# Altium PCB BLBB.PcbDoc
Units mm, origin at the board's own origin, x right, y up, seen from the top; angles counter-clockwise.
Board outline 73.2 x 46.2 mm, 4 copper layers (Top Layer, Int1 (GND), Int2 (PWR), Bottom Layer), stack 1.556 mm thick; 46 components, 23 nets, 171 pads, 38 vias.
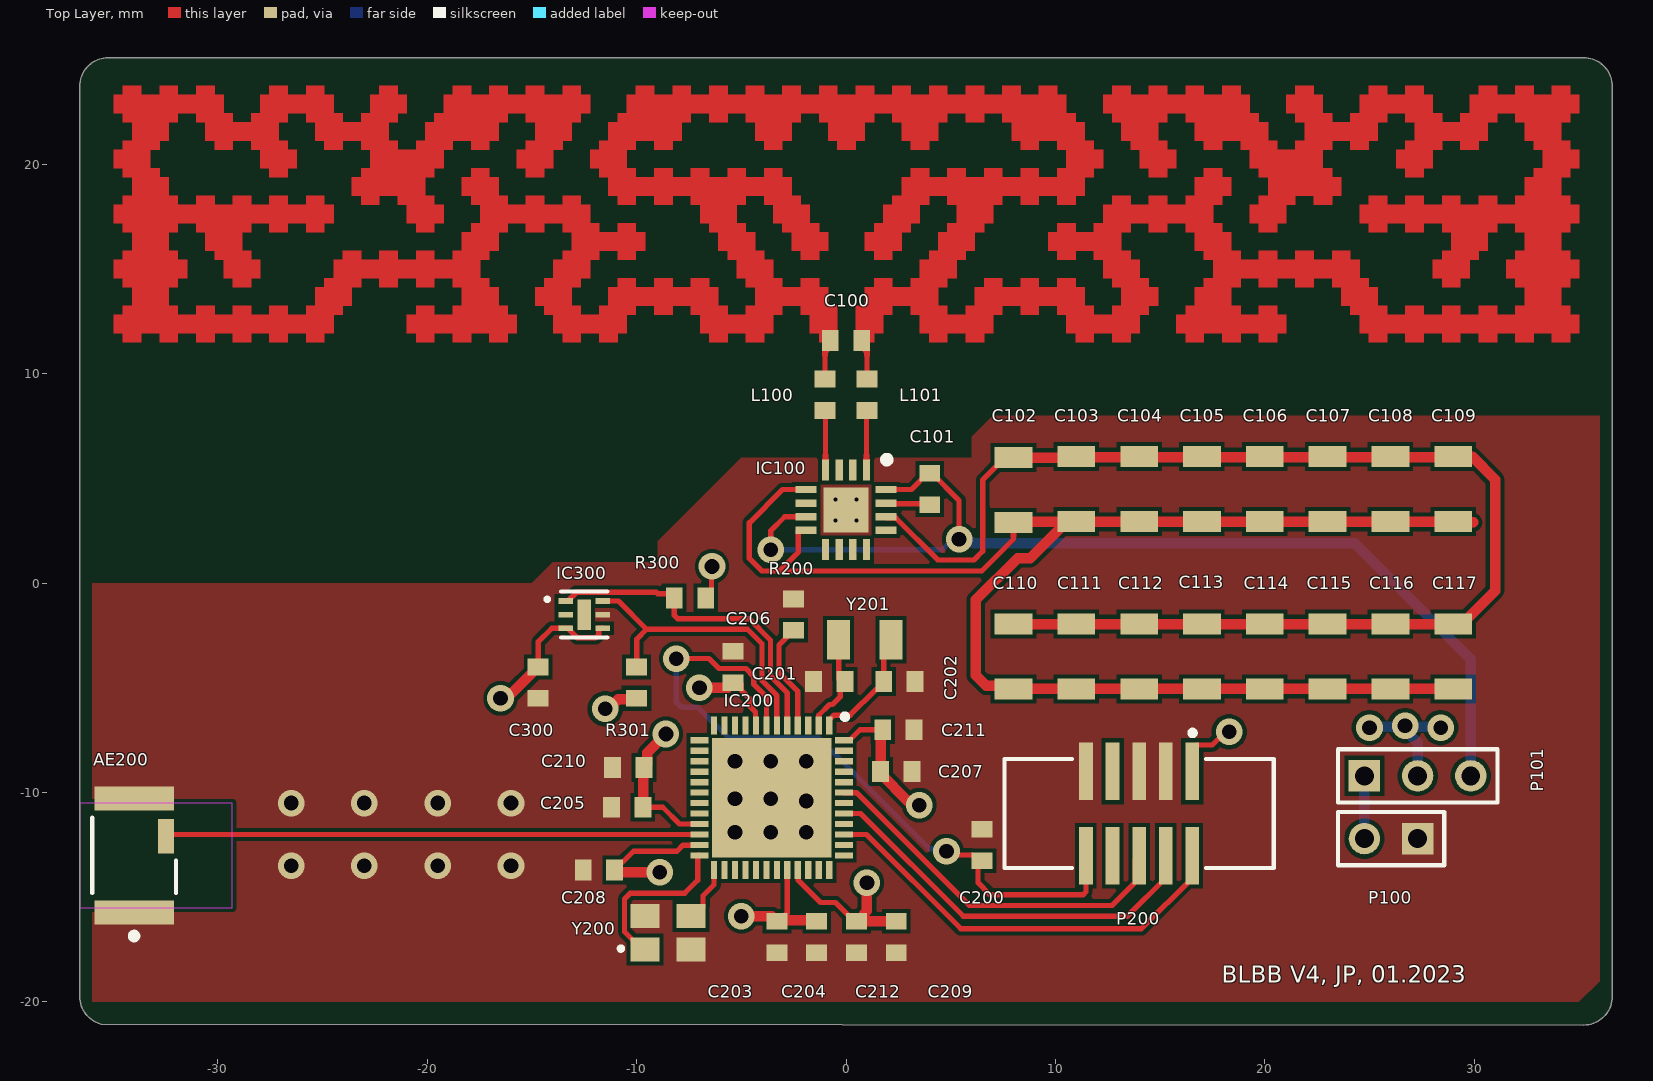
[diagram p0: Top Layer view]
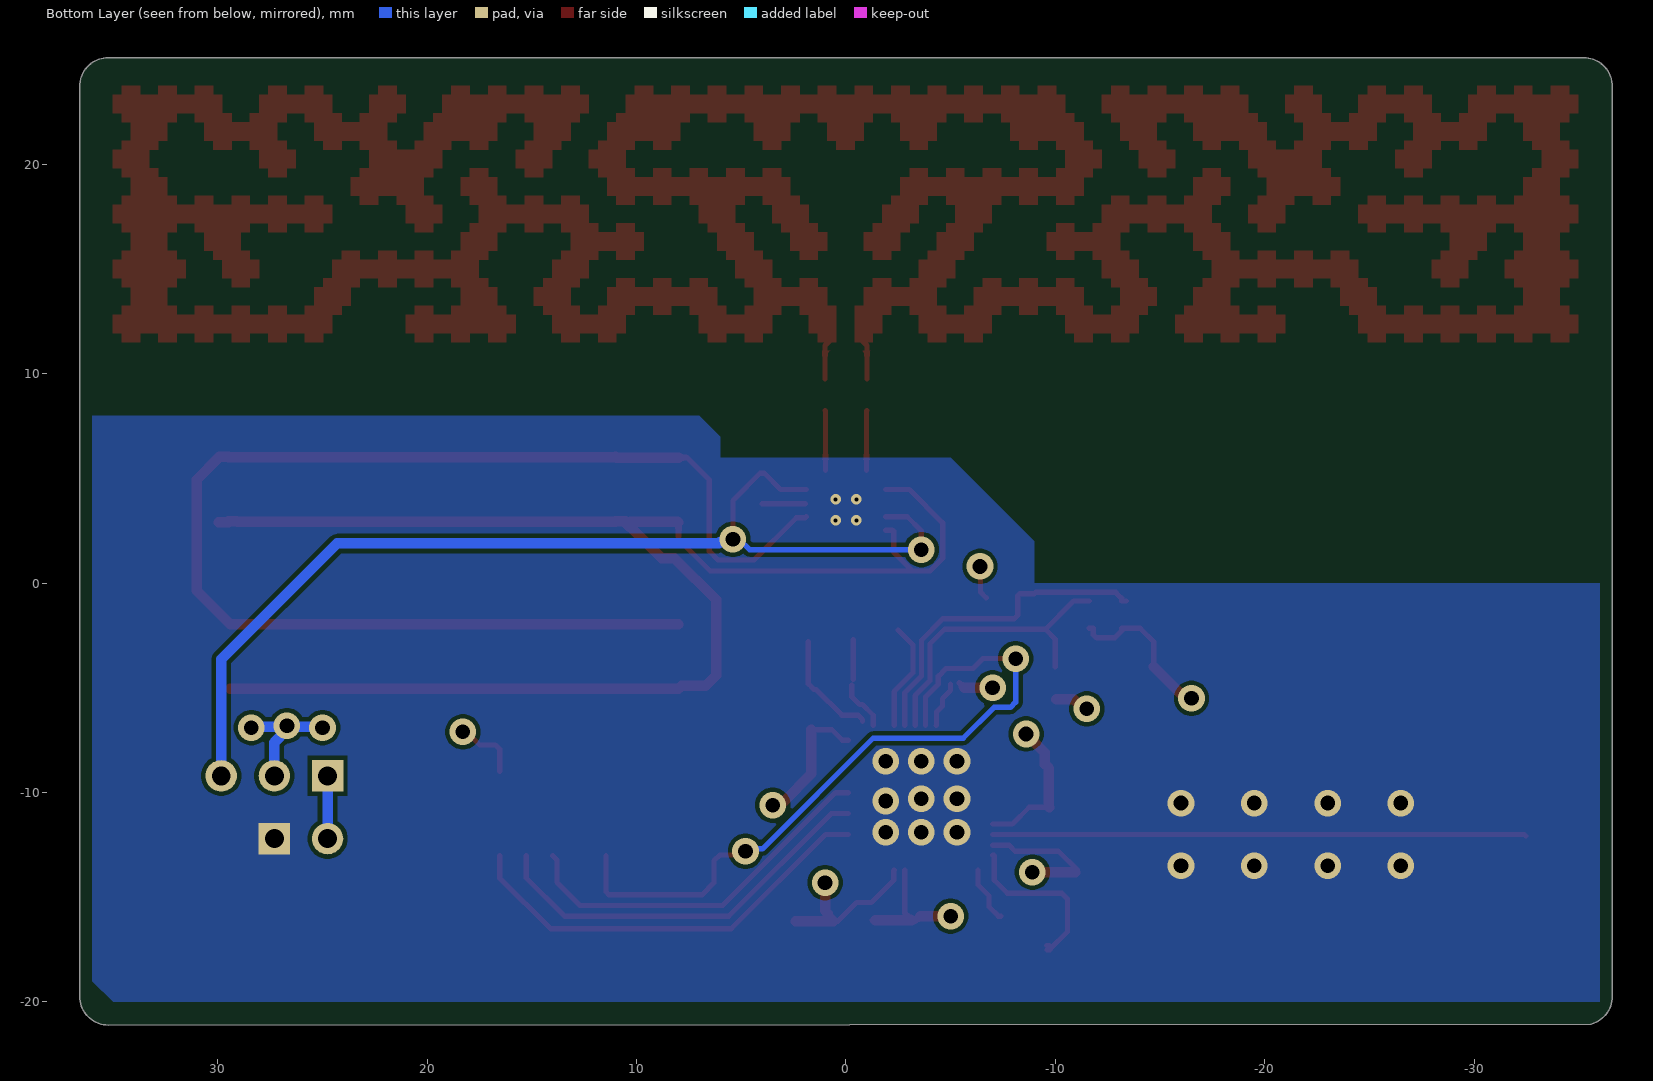
[diagram p1: Bottom Layer view, seen from below]
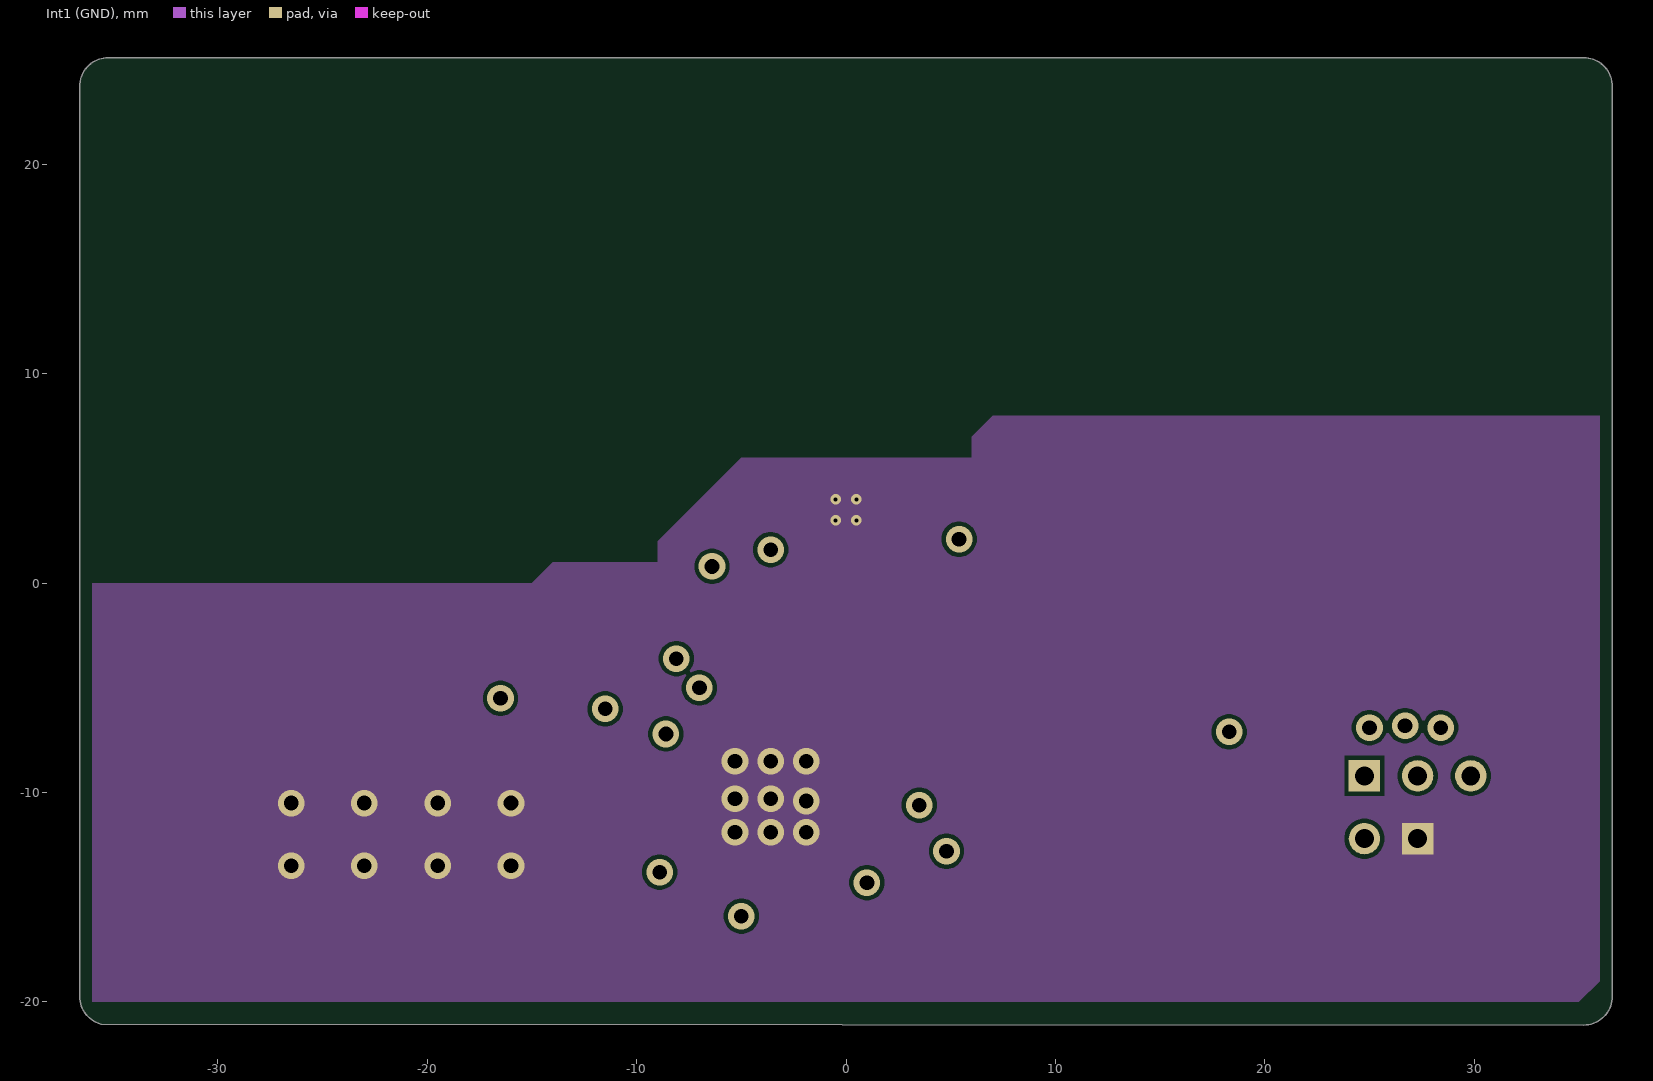
[diagram p2: Int1 (GND)]
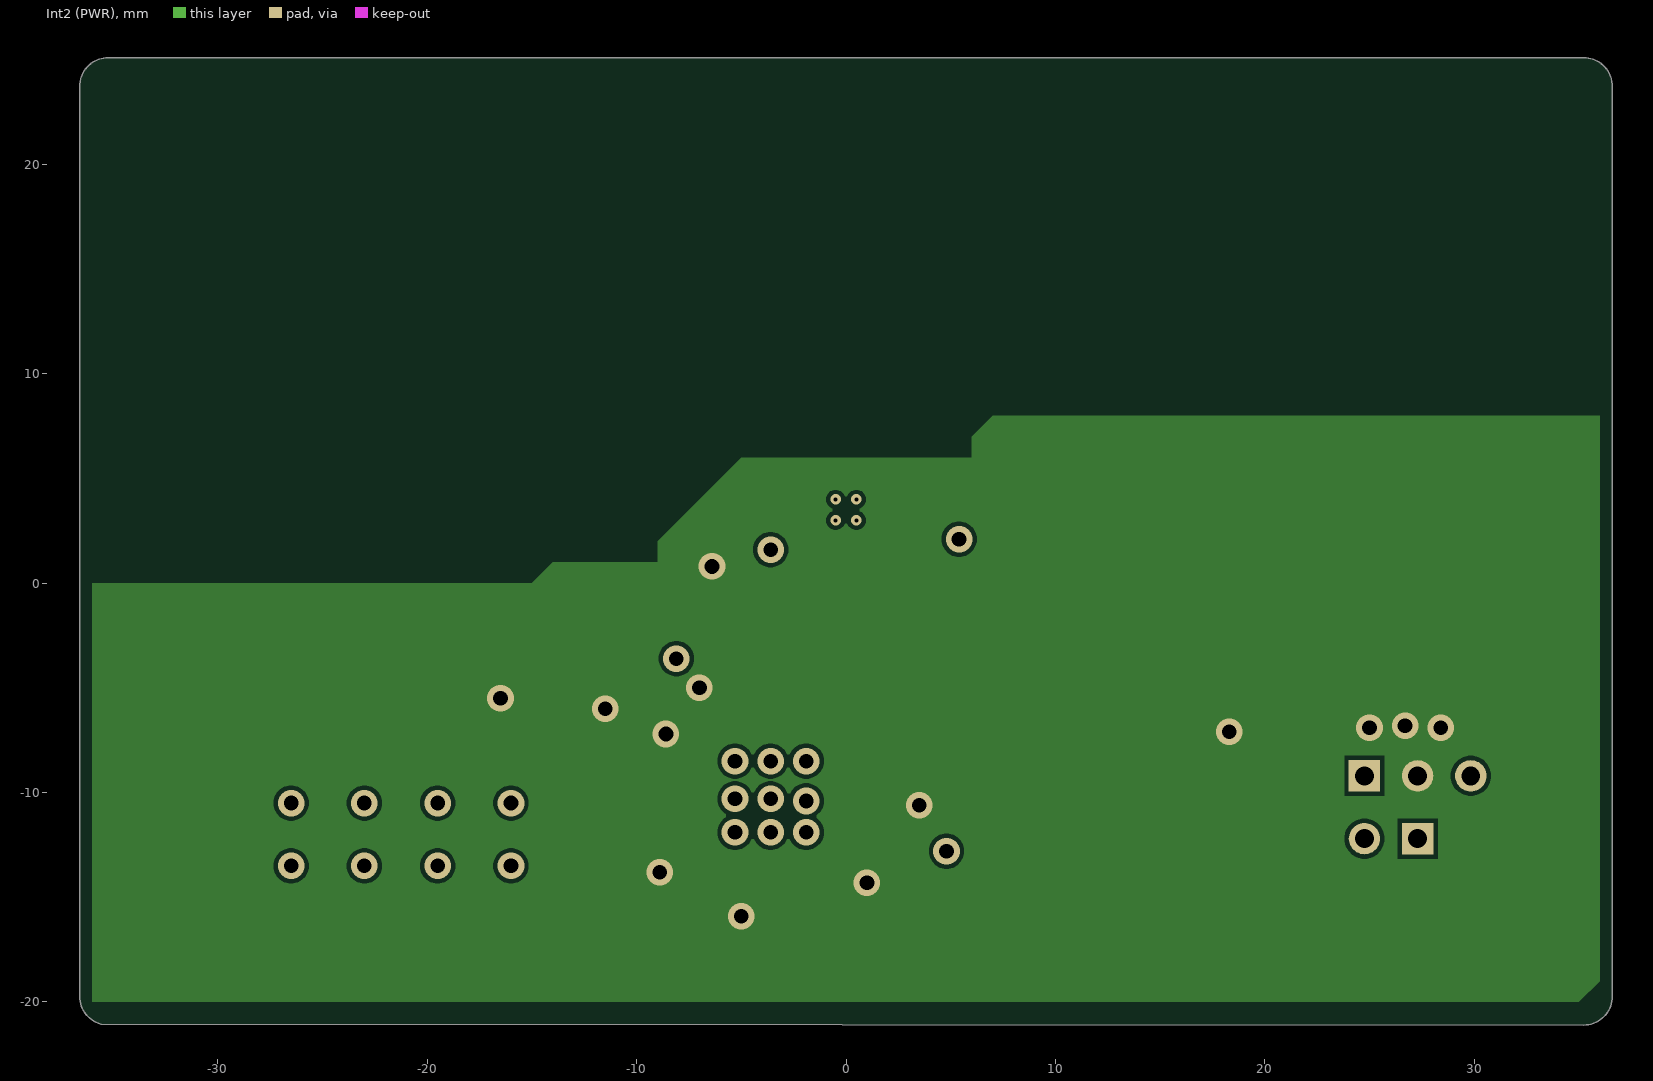
[diagram p3: Int2 (PWR)]
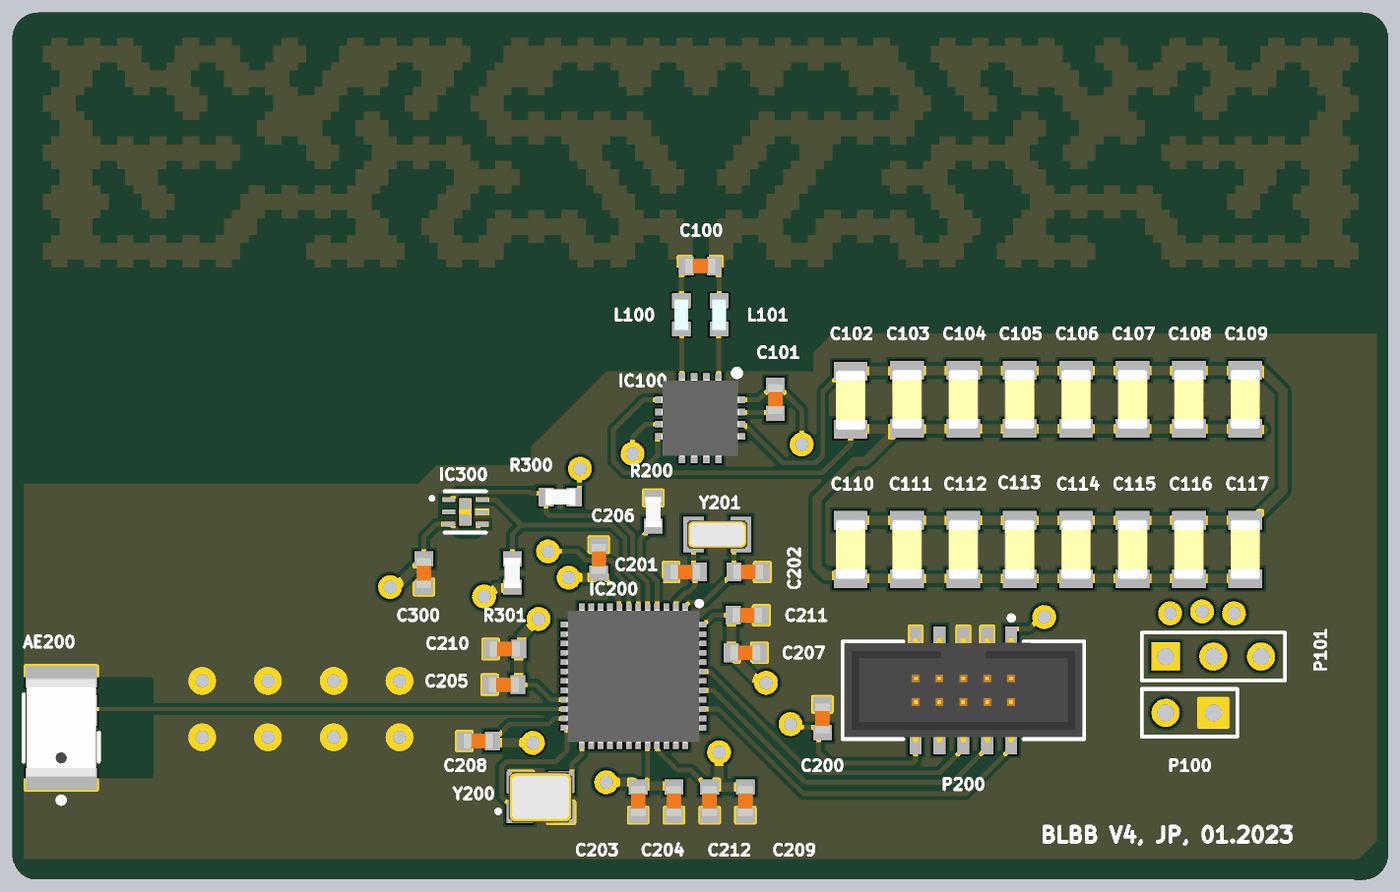
[diagram p4: 3D render of the assembled board from above, using the file's embedded part models]

## Layer stack, top to bottom
Top Solder: solder mask 0.0254, SM-001, Dk 3.7
Top Layer: signal copper 0.04
Dielectric 1: prepreg 0.069, PP-017, Dk 4.3
Dielectric 2: prepreg 0.069, PP-017, Dk 4.3
Int1 (GND): signal copper 0.035
Dielectric 3: core 1.13, Core-039, Dk 4.6
Int2 (PWR): signal copper 0.035
Dielectric 4: prepreg 0.069, PP-017, Dk 4.3
Dielectric 5: prepreg 0.069, PP-017, Dk 4.3
Bottom Layer: signal copper 0.04
Bottom Solder: solder mask 0.0254, SM-001, Dk 3.7

## Board outline
-35.585,-21.054 cw(c-35.23,-19.73) -36.6,-19.73 -36.6,23.73 cw(c-35.23,23.73) -35.23,25.1 -34.5,25.1 -34.499,25.1 35.23,25.1 cw(c35.23,23.73) 36.6,23.73 36.6,-19.73 cw(c35.23,-19.73) 35.23,-21.1

## Design rules (kind name [scope] priority, off if disabled: settings)
Clearance [All] p1: gap=0.15 ignorepadtopadclearanceinfootprint=TRUE except(0: Arc-Hole Track-Hole SMDPad-Hole THPad-Hole Via-Hole Fill-Hole Poly-Hole Region-Hole Text-Hole; 0.2: Arc-Fill Arc-Poly Arc-Region Track-Fill Track-Poly Track-Region SMDPad-Fill SMDPad-Poly SMDPad-Region THPad-Fill THPad-Poly THPad-Region Via-Fill Via-Poly Via-Region Fill-Fill Fill-Poly Fill-Region Poly-Poly Poly-Region Region-Region)
MinimumSolderMaskSliver [All] p1: minsoldermaskwidth=0.1
PlaneConnect [All] p1: planeconnectstyle=Direct reliefexpansion=0.508 reliefentries=4 reliefconductorwidth=0.254 reliefairgap=0.254
PolygonConnect [All] p1: connectstyle=Direct reliefconductorwidth=0.254 reliefentries=4 polygonreliefangle="90 Angle" airgapwidth=0.254
RoutingVias [All] p1: holewidth=0.3 width=1.27 viastyle="Through Hole" minholewidth=0.25 minwidth=1.27 maxholewidth=0.3 maxwidth=1.27
SilkToSilkClearance [All] p1: silktosilkclearance=0.1
SolderMaskExpansion [All] p1: expansion=0.102 istentingtop=FALSE
UnRoutedNet [All] p1: checkbadconnections=TRUE
Width [InNet('VSS')] p1: maxlimit=0.5 minlimit=0.254 preferedwidth=0.5
Width ANTENNA_TRACE [InNet('RF1')] p2: maxlimit=0.227 minlimit=0.227 preferedwidth=0.227 impedanceprofiledriven=TRUE impedanceprofileid={E2F1392F-EA54-4EE5-8188-529D056A2D2E} impedanceprofilevalue=50.000000 minimp=50.000000 maximp=50.000000 favimp=50.000000
Width POWER [InNet('1V8')] p3: maxlimit=1 minlimit=0.254 preferedwidth=0.254 midlayer1_maxwidth=0.254 midlayer2_maxwidth=0.254 minimp=50.000000 maximp=50.000000 favimp=50.000000
Width POWER_1 [InNet('GLOAD')] p4: maxlimit=1 minlimit=0.254 preferedwidth=0.5 midlayer1_maxwidth=0.5 midlayer2_maxwidth=0.5 minimp=50.000000 maximp=50.000000 favimp=50.000000
Width POWER_2 [InNet('VDD')] p5: maxlimit=1 minlimit=0.254 preferedwidth=0.5 midlayer1_maxwidth=0.5 midlayer2_maxwidth=0.5 minimp=50.000000 maximp=50.000000 favimp=50.000000
Width POWER_3 [InNet('VREGL')] p6: maxlimit=1 minlimit=0.254 preferedwidth=0.5 midlayer1_maxwidth=0.5 midlayer2_maxwidth=0.5 minimp=50.000000 maximp=50.000000 favimp=50.000000
26 further rules are at their usual default settings.

## Components (designator, comment, footprint, x,y, rotation, side; value= is the part's Value field where it differs from the comment)
AE200 "7488960245" 7488960245 -34,-13 r90 top
C100 "C0603_10V" CAP_0603 0,11.6 r0 top
C101 "10uF" CAP_0603 4,4.5 r90 top
C102 "100uF" CAP_1206 8,4.45 r90 top
C103 "100uF" CAP_1206 11,4.5 r90 top
C104 "100uF" CAP_1206 14,4.5 r90 top
C105 "100uF" CAP_1206 17,4.5 r90 top
C106 "100uF" CAP_1206 20,4.5 r90 top
C107 "100uF" CAP_1206 23,4.5 r90 top
C108 "100uF" CAP_1206 26,4.5 r90 top
C109 "100uF" CAP_1206 29,4.5 r90 top
C110 "100uF" CAP_1206 8,-3.5 r90 top
C111 "100uF" CAP_1206 11,-3.5 r90 top
C112 "100uF" CAP_1206 14,-3.5 r90 top
C113 "100uF" CAP_1206 17,-3.5 r90 top
C114 "100uF" CAP_1206 20,-3.5 r90 top
C115 "100uF" CAP_1206 23,-3.5 r90 top
C116 "100uF" CAP_1206 26,-3.5 r90 top
C117 "100uF" CAP_1206 29,-3.5 r90 top
C200 "100nF" CAP_0603 6.5,-12.5 r270 top
C201 "10pF" CAP_0603 -0.8,-4.7 r0 top
C202 "10pF" CAP_0603 2.55,-4.7 r180 top
C203 "100nF" CAP_0603 -3.3,-16.9 r90 top
C204 "100nF" CAP_0603 -1.4,-16.9 r90 top
C205 "100nF" CAP_0603 -10.45,-10.7 r0 top
C206 "100nF" CAP_0603 -5.4,-4 r270 top
C207 "100nF" CAP_0603 2.4,-9 r180 top
C208 "100nF" CAP_0603 -11.8,-13.7 r0 top
C209 "1uF" CAP_0603 2.4,-16.9 r90 top
C210 "10nF" CAP_0603 -10.4,-8.8 r0 top
C211 "4u7F" CAP_0603 2.5,-7 r180 top
C212 "4u7F" CAP_0603 0.5,-16.9 r90 top
C300 "100nF" CAP_0603 -14.7,-4.75 r90 top
IC100 "ROCKY100-QFN" QFN65P400X400X80-17N-D 0,3.5 r270 top
IC200 "STM32WB15CCU6E" QFN50P700X700X65-49N-D -3.55,-10.25 r270 top
IC300 "WSEN-TIDS_2521020222501" WSEN-TIDS_2521020222501 -12.5,-1.5 r0 top
L100 "36nH" IND_0603 -1,9 r90 top
L101 "36nH" IND_0603 1,9 r90 top
P100 "Power Select" HDR1X3 24.76,-9.2 r0 top
P101 "External Power" HDR1X2 27.3,-12.2 r180 top
P200 "62701020621" 62701020621 14,-11 r180 top
R200 "10k" RES_0603 -2.5,-1.5 r270 top
R300 "10k" RES_0603 -7.45,-0.7 r0 top
R301 "10k" RES_0603 -10,-4.75 r90 top
Y200 "32MHz" WE-XTAL_CFPX-180 -8.5,-16.7 r0 top
Y201 "32.768kHz" WE-XTAL_CFPX-217 0.9,-2.7 r0 top

## Footprints (in the part's own frame and the unit in brackets; to place one, negate y for a bottom-side part, rotate by r counter-clockwise, add the part's x,y. Pads: shape width x height; smd on the part's side, far side on the other; paste and mask are expansions set on the pad)
7488960245 [mm] "SMT-Multilayer Chip Antenne, body size 5.2x3.7mm"
  rect 1.65x0.75 smd: 1(0.925,-1.525)
  rect 1.15x3.8 smd: 2(-2.725,0) 3(2.725,0)
  silkscreen extent -4,-2 1.8,2, body extent -2.6,-1.85 2.6,1.85, height 0.7
62701020621 [mm] "Boc Header SMT type, 10p"
  rect 0.65x2.76 smd: 1(-2.54,-2.02) 2(-2.54,2.02) 3(-1.27,-2.02) 4(-1.27,2.02) 5(0,-2.02) 6(0,2.02) 7(1.27,-2.02) 8(1.27,2.02) 9(2.54,-2.02) 10(2.54,2.02)
  silkscreen extent -6.43,-3.97 6.43,2.6, body extent -6.35,-2.8 6.35,2.8, height 5.2
CAP_0603 [mm]
  rect 0.8x1 smd: 1(-0.75,0) 2(0.75,0)
  body extent -0.8,-0.4 0.8,0.4, height 0.51
CAP_1206 [mm]
  rect 1x1.8 smd: 1(-1.55,0) 2(1.55,0)
  body extent -1.6,-0.8 1.6,0.8, height 0.94
HDR1X2 [mm] "Connector; Header; 2 Position"
  rect 1.5x1.5 hole 0.9: 1(0,0)
  round 1.5 hole 0.9: 2(2.54,0)
  silkscreen extent -1.27,-1.27 3.81,1.27
HDR1X3 [mm] "Connector; Header; 3 Position"
  rect 1.5x1.5 hole 0.9: 1(0,0)
  round 1.5 hole 0.9: 2(2.54,0) 3(5.08,0)
  silkscreen extent -1.27,-1.27 6.35,1.27
IND_0603 [mm]
  rect 0.8x1 smd: 1(-0.75,0) 2(0.75,0)
  body extent -0.81,-0.37 0.81,0.37, height 0.87
QFN50P700X700X65-49N-D [mm]
  rect 0.85x0.3 smd: 1(-3.45,2.75) 2(-3.45,2.25) 3(-3.45,1.75) 4(-3.45,1.25) 5(-3.45,0.75) 6(-3.45,0.25) 7(-3.45,-0.25) 8(-3.45,-0.75) 9(-3.45,-1.25) 10(-3.45,-1.75) 11(-3.45,-2.25) 12(-3.45,-2.75) 25(3.45,-2.75) 26(3.45,-2.25) 27(3.45,-1.75) 28(3.45,-1.25) 29(3.45,-0.75) 30(3.45,-0.25) 31(3.45,0.25) 32(3.45,0.75) 33(3.45,1.25) 34(3.45,1.75) 35(3.45,2.25) 36(3.45,2.75)
  rect 0.3x0.85 smd: 13(-2.75,-3.45) 14(-2.25,-3.45) 15(-1.75,-3.45) 16(-1.25,-3.45) 17(-0.75,-3.45) 18(-0.25,-3.45) 19(0.25,-3.45) 20(0.75,-3.45) 21(1.25,-3.45) 22(1.75,-3.45) 23(2.25,-3.45) 24(2.75,-3.45) 37(2.75,3.45) 38(2.25,3.45) 39(1.75,3.45) 40(1.25,3.45) 41(0.75,3.45) 42(0.25,3.45) 43(-0.25,3.45) 44(-0.75,3.45) 45(-1.25,3.45) 46(-1.75,3.45) 47(-2.25,3.45) 48(-2.75,3.45)
  rect 5.7x5.7 smd: 49(0,0)
  silkscreen extent -4,3.38 -3.75,3.63, body extent -3.55,-3.55 3.55,3.55, height 0.65
QFN65P400X400X80-17N-D [mm]
  rect 1x0.35 smd: 1(-1.9,0.975) 2(-1.9,0.325) 3(-1.9,-0.325) 4(-1.9,-0.975) 9(1.9,-0.975) 10(1.9,-0.325) 11(1.9,0.325) 12(1.9,0.975)
  rect 0.35x1 smd: 5(-0.975,-1.9) 6(-0.325,-1.9) 7(0.325,-1.9) 8(0.975,-1.9) 13(0.975,1.9) 14(0.325,1.9) 15(-0.325,1.9) 16(-0.975,1.9)
  rect 2.15x2.15 smd: 17(0,0)
  silkscreen extent -2.56,1.79 -2.24,2.11, body extent -2.05,-2.05 2.05,2.05, height 0.8
RES_0603 [mm]
  rect 0.8x1 smd: 1(-0.75,0) 2(0.75,0)
  body extent -0.8,-0.43 0.8,0.43, height 0.52
WE-XTAL_CFPX-180 [mm] "Quartz Crystal, size CFPX-180, body 3.4x2.7mm"
  rect 1.4x1.15 smd: 1(-1.1,-0.8) 2(1.1,-0.8) 3(1.1,0.8) 4(-1.1,0.8)
  silkscreen extent -2.35,-0.85 -2.15,-0.65, body extent -1.7,-1.35 1.7,1.35, height 0.65
WE-XTAL_CFPX-217 [mm] "Quartz Crystal, size CFPX-217, body 3.2x1.5mm"
  rect 1.1x1.9 smd: 1(-1.25,0) 2(1.25,0)
  body extent -1.6,-0.75 1.6,0.75, height 0.75
WSEN-TIDS_2521020222501 [mm]
  rect 0.7x0.27 smd paste-0.02 mask+0.05: 1(-0.89,0.65) 2(-0.89,0) 3(-0.89,-0.65) 4(0.89,-0.65) 5(0.89,0) 6(0.89,0.65)
  rect 0.65x1.45 smd paste-0.4: Z1(0,0)
  silkscreen extent -1.82,-1.1 1.1,1.1, body extent -1,-1 1,1, height 0.25

## Part data
AE200: "WE-MCA SMT Multilayer Chip Antenna, 1 Band, 2400-2500MHz, 50Ω", Frequency Range=2400-2500MHz, Manufacturer="Wurth Elektronik", Operating Temperature Max=85°C, Operating Temperature Min=-40°C, Category=Antennas, ComponentLink1Description="Website Link", ComponentLink1URL=https://www.we-online.com/redexpert/article/7488960245?ad, ComponentLink2Description="Datasheet Link", ComponentLink2URL=https://www.we-online.com/redexpert/spec/7488960245?ad, Height=0.7mm, Impedance=50Ω, Length=5.2mm, Manufacturer Part Number=7488960245, Match Code=WE-MCA, Mount="Surface Mount", Number of Bands=1, Packaging="Tape and Reel", Peak Gain=3dBi, VSWR=2.5, Width=3.7mm
C100 C101 C200 C201 C202 C203 C204 C205 C206 C207 C208 C209 C210 C211 C212 C300: library part CAP_0603_10V, "Capacitor SMD 0603 10V"
C102 C103 C104 C105 C106 C107 C108 C109 C110 C111 C112 C113 C114 C115 C116 C117: library part CAP_1206_10V, "Capacitor SMD 1206 10V"
IC100: "Integrated Circuit", Manufacturer_Name=Farsens, Datasheet Link=http://www.farsens.com/wp-content/uploads/2017/12/DS-ROCKY100-V04.pdf, Height=0.8mm, Manufacturer_Part_Number=ROCKY100-QFN
IC200: "Integrated Circuit", Manufacturer_Name=STMicroelectronics, Mouser Part Number=511-STM32WB15CCU6E, Arrow Part Number=STM32WB15CCU6E, Arrow Price/Stock=https://www.arrow.com/en/products/stm32wb15ccu6e/stmicroelectronics?region=nac, Datasheet Link=https://www.st.com/resource/en/datasheet/stm32wb15cc.pdf, Height=0.65mm, Manufacturer_Part_Number=STM32WB15CCU6E, Mouser Price/Stock=https://www.mouser.co.uk/ProductDetail/STMicroelectronics/STM32WB15CCU6E?qs=DRkmTr78QARFXKemW9838Q%3D%3D
IC300: Manufacturer="Würth Elektronik", NR=2521020222501
L100 L101: library part IND_0603, "Inductor SMD 0603"
P100: library part "Header 3", "Header, 3-Pin", LatestRevisionDate=17-Jul-2002, LatestRevisionNote="Re-released for DXP Platform.", Publisher="Altium Limited"
P101: library part "Header 2", LatestRevisionDate=17-Jul-2002, LatestRevisionNote="Re-released for DXP Platform.", Publisher="Altium Limited"
P200: "WR-BHD Male Box Header, SMT Straight, pitch 1.27mm, 10pins", Contact Resistance=20mΩ, Insulation Resistance=1000MΩ, Manufacturer="Wurth Elektronik", Operating Temperature Max=105°C, Operating Temperature Min=-40°C, Rated Current=1A, Withstanding Voltage=500V, Working Voltage=50V, Category="Wire-to-Board Connectors", ComponentLink1Description="Website Link", ComponentLink1URL=https://www.we-online.com/redexpert/article/62701020621?ad, ComponentLink2Description="Datasheet Link", ComponentLink2URL=https://www.we-online.com/redexpert/spec/62701020621?ad, Gender=Male, Height=5.3mm, Length=12.7mm, Manufacturer Part Number=62701020621, Match Code=WR-BHD, Mount="Surface Mount", Number of Pins=10, Number of Rows=2, Orientation=Straight, Packaging="Tape and Reel", Pitch=1.27mm, Width=5mm
R200 R300 R301: library part RES_0603, "Resistor SMD 0603"
Y200: library part 830060258, "WE-XTAL Quartz Crystal, SMT, CFPX-180, 32MHz, +/-30ppm", Case/Size Code=CFPX-180, Frequency Stability=+/-30ppm, Load Capacitance=10pF, Manufacturer="Wurth Elektronik", Operating Temperature Max=70°C, Operating Temperature Min=-20°C, Category=Crystals, ComponentLink1Description="Website Link", ComponentLink1URL=https://www.we-online.com/redexpert/article/830060258?ad, ComponentLink2Description="Datasheet Link", ComponentLink2URL=https://www.we-online.com/redexpert/spec/830060258?ad, Frequency=32MHz, Frequency Tolerance=+/-30ppm, Height=0.8mm, Length=3.4mm, Manufacturer Part Number=830060258, Match Code=WE-XTAL, Mount="Surface Mount", Packaging="Tape and Reel", Width=2.7mm
Y201: library part 830009709, "WE-XTAL Watch Crystal, SMT, CFPX-217, 32.768kHz, +/-20ppm", Case/Size Code=CFPX-217, Frequency Tolerance=+/-20ppm, Load Capacitance=7pF, Manufacturer="Wurth Elektronik", Operating Temperature Max=85°C, Operating Temperature Min=-40°C, Category=Crystals, ComponentLink1Description="Website Link", ComponentLink1URL=https://www.we-online.com/redexpert/article/830009709?ad, ComponentLink2Description="Datasheet Link", ComponentLink2URL=https://www.we-online.com/redexpert/spec/830009709?ad, Frequency=32.768kHz, Height=0.9mm, Length=3.2mm, Manufacturer Part Number=830009709, Match Code=WE-XTAL, Mount="Surface Mount", Packaging="Tape and Reel", Width=1.5mm

## Via types
v1: diameter 1.27, hole 0.7, Top Layer to Bottom Layer, 34 vias
v2: diameter 0.5, hole 0.2, Top Layer to Bottom Layer, 4 vias

## Nets (pads, with @x,y where several pads share a name; then routed paths per layer and width w, separated by ;. In a path a pad name is that pad's centre, name@x,y a point inside that pad or via, vN(x,y) a via of type N, cw(c..) or ccw(c..) an arc to the next point about the centre after c; other vN are vias at no path point)
1V8: C203.2 C204.2 C205.2 C206.2 C207.2 C208.2 C209.2 C210.2 C211.2 C212.2 C300.2 IC200.8 IC200.21 IC200.23 IC200.32 IC200.33 IC200.48 IC300.3 IC300.4 P100.2 P200.1 R300.2 R301.1 | length 58.9
  Top Layer w0.254: v1@-16.306,-5.306 v1@-16.006,-5.306 ; C300.2 -14.7,-2.8 -14.05,-2.15 IC300.3 -13.175,-2.15 -13.167,-2.158 -13.167,-2.275 -12.832,-2.61 -11.963,-2.61 -11.815,-2.461 -11.815,-2.158 -11.807,-2.15 IC300.4 ; v1(-11.5,-6) v1@-11.331,-6 ; C208.2@-10.95,-13.8 C208.2 -10.15,-12.8 -8.069,-12.8 -7.777,-12.508 -7.008,-12.508 IC200.23 ; R301.1@-10.05,-5.55 R301.1 ; C205.2 -8.751,-10.7 -7.951,-11.5 IC200.21 ; R300.2 -6.427,-0.427 -6.427,0.773 v1(-6.4,0.8) ; C206.2@-5.65,-5 C206.2 ; C206.2@-4.992,-4.815 -4.992,-5.128 -4.608,-5.512 -4.608,-5.867 -4.323,-6.152 -4.323,-6.777 IC200.8 ; C203.2@-3.55,-15.9 C203.2 -3.2,-16.15 -3.15,-16.1 -2.8,-15.75 IC200.32 ; IC200.33 -2.277,-13.723 -2.277,-14.19 -1.217,-15.25 -0.5,-15.25 0.4,-16.15 C212.2 C212.2@0.6,-16.15 ; C204.2@-1.4,-16.1 C204.2@-1.25,-16.1 ; IC200.48 0.175,-7.5 0.675,-7 C211.2@1.65,-7 ; C212.2@0.873,-15.877 C212.2@0.873,-15.777 ; C207.2@1.65,-9.1 C207.2 ; v1@2.956,-10.406 3.306,-10.406 v1(3.5,-10.6) ; P200.1 16.54,-7.925 16.738,-7.727 17.49,-7.727 18.117,-7.1 v1(18.3,-7.1)
  Top Layer w0.5: v1(-16.5,-5.5) v1@-16.306,-5.306 ; v1@-16.006,-5.306 C300.2 ; v1@-11.331,-6 -10.881,-5.55 R301.1@-10.05,-5.55 ; C208.2@-10.95,-13.8 v1(-8.9,-13.8) ; C205.2 -9.675,-10.675 -9.675,-8.825 C210.2 -9.5,-8.65 -9.5,-8.1 v1(-8.6,-7.2) ; v1(-7,-5) C206.2@-5.65,-5 ; v1(-5,-15.9) C203.2@-3.55,-15.9 ; C203.2@-3.15,-16.1 C204.2@-1.4,-16.1 ; C212.2@0.873,-15.877 0.6,-16.15 C209.2 ; C212.2@0.873,-15.777 1,-15.65 v1(1,-14.3) ; C207.2@1.65,-9.1 v1@2.956,-10.406 ; C207.2 C211.2@1.65,-7
  Bottom Layer w0.5: v1(25,-6.9) 25.05,-6.85 26.65,-6.85 v1(26.7,-6.8) ; P100.2 27.3,-7.608 26.7,-7.008 v1(26.7,-6.8) ; v1(28.4,-6.9) 28.35,-6.85 26.75,-6.85 v1(26.7,-6.8)
BOOT0: IC200.4 R200.2 | length 5.2
  Top Layer w0.254: R200.2 -3.2,-2.95 -3.2,-4.271 -2.3,-5.171 IC200.4
GLOAD: C101.1 IC100.15 | length 2.1
  Top Layer w0.254: IC100.15@1.937,3.787 C101.1@4,3.787
GND: AE200.2 AE200.3 C200.1 C201.1 C202.1 C203.1 C204.1 C205.1 C206.1 C207.1 C208.1 C209.1 C210.1 C211.1 C212.1 C300.1 IC100.17 IC200.49 IC300.5 P101.1 P200.3 P200.5 P200.9 R200.1 Y200.2 Y200.4
  other v1: -26.5,-13.5 -23,-13.5 -19.5,-13.5 -16,-13.5 -5.3,-11.9 -3.6,-11.9 -1.9,-11.9 -26.5,-10.5 -23,-10.5 -19.5,-10.5 -16,-10.5 -1.9,-10.4 -5.3,-10.3 -3.6,-10.3 -5.3,-8.5 -3.6,-8.5 -1.9,-8.5
  other v2: -0.5,3 0.5,3 -0.5,4 0.5,4
I2C_SCL: IC200.5 IC300.1 R300.1 | length 15.9
  Top Layer w0.254: IC300.1 -13.175,-0.85 -13.167,-0.842 -13.167,-0.725 -12.88,-0.438 -9.062,-0.438 -9,-0.5 -8.315,-0.5 -8.2,-0.615 R300.1 -8.2,-1.543 -8.051,-1.692 -4.637,-1.692 -3.604,-2.725 -3.604,-4.438 -2.8,-5.242 IC200.5@-2.8,-6.792
I2C_SDA: IC200.6 IC300.6 R301.2 | length 14.6
  Top Layer w0.254: IC300.6 -10.869,-0.85 -9.519,-2.2 ; R301.2 -10,-2.681 -9.519,-2.2 ; IC200.6 -3.3,-5.362 -4.008,-4.654 -4.008,-2.892 -4.7,-2.2 -9.519,-2.2
NRST: C200.2 IC200.7 P200.10 | length 34.5
  Top Layer w0.254: v1(-8.1,-3.6) -6.542,-3.6 -6.069,-4.073 -4.785,-4.073 -4.412,-4.446 -4.412,-4.822 -3.8,-5.434 IC200.7 ; v1(4.8,-12.8) 4.977,-12.977 6.027,-12.977 6.3,-13.25 6.3,-14.3 6.884,-14.884 11.311,-14.884 11.46,-14.735 P200.10
  Bottom Layer w0.254: v1(-8.1,-3.6) -8.1,-5.68 -7.851,-5.929 -7.071,-5.929 -5.6,-7.4 -1.3,-7.4 3.986,-12.686 4.686,-12.686 v1(4.8,-12.8)
"OSC OUT": IC200.24 Y200.1 | length 8.1
  Top Layer w0.254: Y200.1@-9.7,-17.3 Y200.1@-9.575,-17.3 ; Y200.1 -9.725,-17.5 -10.577,-16.648 -10.577,-15.077 -10.3,-14.8 -7.7,-14.8 -7.082,-14.182 -7.082,-13.023 -7.059,-13 IC200.24
"OSC_32 IN": C202.2 IC200.1 Y201.2 | length 5.4
  Top Layer w0.254: IC200.1@-0.792,-6.6 -0.792,-6.517 -0.575,-6.3 0.2,-6.3 1.427,-5.073 1.527,-5.073 1.8,-4.8 C202.2 1.801,-4.699 Y201.2@1.801,-2.795
"OSC_32 OUT": C201.2 IC200.2 Y201.1 | length 4.3
  Top Layer w0.254: IC200.2 -1.3,-6.307 -0.785,-5.792 -0.642,-5.792 -0.282,-5.432 C201.2@-0.282,-4.868 ; C201.2@-0.35,-4.6 Y201.1
OSC_IN: IC200.25 Y200.3 | length 2.7
  Top Layer w0.254: Y200.3 -7.275,-15.9 -6.827,-15.452 -6.827,-14.927 -6.3,-14.4 IC200.25
"Power Select": P100.1 P101.2 | length 3
  Bottom Layer w0.5: P101.2 P100.1
RF1: AE200.1 IC200.22 | length 25.5
  Top Layer w0.227: AE200.1 -32.4,-12 IC200.22
RF+: IC100.1 L101.1 | length 2.9
  Top Layer w0.254: IC100.1 0.975,8.225 L101.1
RF-: IC100.4 L100.1 | length 2.9
  Top Layer w0.254: L100.1 -0.975,8.225 IC100.4
RFID+: C100.2 L101.2 | length 2
  Top Layer w0.254: C100.2 1,11.35 L101.2
RFID-: C100.1 L100.2 | length 2
  Top Layer w0.254: L100.2 -1,11.35 C100.1
SWCLK: IC200.41 P200.4 | length 19.2
  Top Layer w0.254: IC200.41 0.7,-11 5.6,-15.9 13.445,-15.9 15.27,-14.075 P200.4
SWDIO: IC200.39 P200.2 | length 20.6
  Top Layer w0.254: IC200.39 0.982,-12 5.482,-16.5 14.115,-16.5 16.54,-14.075 P200.2
SWO: IC200.43 P200.6 | length 17.9
  Top Layer w0.254: IC200.43 -0.097,-10.003 0.503,-10.003 5.892,-15.392 12.708,-15.392 13.802,-14.298 13.802,-13.218 P200.6
VDD: C102.2 C103.2 C104.2 C105.2 C106.2 C107.2 C108.2 C109.2 C110.2 C111.2 C112.2 C113.2 C114.2 C115.2 C116.2 C117.2 IC100.14 | length 63.5
  Top Layer w0.254: IC100.14 1.948,3.127 2.373,3.127 4.389,1.111 6.111,1.111 6.524,1.524 6.524,4.924 7.6,6 C102.2 ; C103.2@10.975,6.025 C103.2 ; C109.2@29.45,6 29.475,6.025 C109.2@29.5,6.05
  Top Layer w0.5: C110.2 C111.2 C112.2 C113.2 C114.2 C115.2 C116.2 29.4,-1.95 31,-0.35 31,4.95 29.9,6.05 C109.2@29.5,6.05 ; C102.2 10.95,6 C103.2 ; C103.2@10.975,6.025 C109.2@29.475,6.025
VREGL: C101.2 IC100.7 IC100.16 P100.3 | length 50.7
  Top Layer w0.254: v1(-3.6,1.6) -3.6,2.5 -2.925,3.175 IC100.7 ; IC100.16 3.125,4.475 3.9,5.25 C101.2 4.1,5.25 5.4,3.95 v1(5.4,2.1)
  Bottom Layer w0.254: v1(-3.6,1.6) 4.6,1.6 5.1,2.1 v1(5.4,2.1)
  Bottom Layer w0.5: v1(5.4,2.1) 5.547,1.953 6.025,1.953 6.078,1.9 24.3,1.9 29.84,-3.64 P100.3
VSS: C102.1 C103.1 C104.1 C105.1 C106.1 C107.1 C108.1 C109.1 C110.1 C111.1 C112.1 C113.1 C114.1 C115.1 C116.1 C117.1 IC100.5 IC100.8 | length 76.8
  Top Layer w0.254: IC100.8 -2.225,2.525 -2.273,2.477 -2.273,1.49 -3.179,0.584 ; IC100.5 -3.025,4.475 -4.616,2.884 -4.616,1.179 -4.021,0.584 -3.179,0.584 ; C102.1 8,2.1 6.484,0.584 -3.179,0.584
  Top Layer w0.5: C102.1 8.025,2.925 C103.1@10.3,2.925 ; C103.1@11,2.925 14,2.925 17,2.925 20,2.925 23,2.925 26,2.925 29.075,2.925 29.1,2.95 C109.1@29.5,2.95 ; C103.1 10.55,2.95 10.55,2.9 10.35,2.7 10.3,2.7 8.8,1.2 8.2,1.2 6.2,-0.8 6.2,-4.4 6.695,-4.895 7.845,-4.895 C110.1 C111.1 C112.1 C113.1 C114.1 C115.1 C116.1 C117.1 C117.1@29.4,-5.05 ; C109.1@29.5,2.9 29.95,2.9
pads on no net: IC100.2 IC100.3 IC100.6 IC100.9 IC100.10 IC100.11 IC100.12 IC100.13 IC200.3 IC200.9 IC200.10 IC200.11 IC200.12 IC200.13 IC200.14 IC200.15 IC200.16 IC200.17 IC200.18 IC200.19 IC200.20 IC200.26 IC200.27 IC200.28 IC200.29 IC200.30 IC200.31 IC200.34 IC200.35 IC200.36 IC200.37 IC200.38 IC200.40 IC200.42 IC200.44 IC200.45 IC200.46 IC200.47 IC300.2 IC300.Z1 P200.7 P200.8

## Polygon pours and split planes (outlines as drawn)
GND on Bottom Layer "GND_L04_P001" (solid, pour order 1): -36,0 -9,0 -9,2 -5,6 6,6 6,7 7,8 36,8 36,-19 35,-20 -36,-20
GND on Top Layer "GND_L01_P003" (solid, pour order 3): 6,6 6,7 7,8 36,8 36,-19 35,-20 -36,-20 -36,0 -15,0 -14,1 -9,1 -9,2 -5,6
GND on Int1 (GND) "GND_L02_P006" (solid, pour order 6): 6,6 6,7 7,8 36,8 36,-19 35,-20 -36,-20 -36,0 -15,0 -14,1 -9,1 -9,2 -5,6
1V8 on Int2 (PWR) "1V8_L03_P007" (solid, pour order 7): 6,6 6,7 7,8 36,8 36,-19 35,-20 -36,-20 -36,0 -15,0 -14,1 -9,1 -9,2 -5,6

## Keep-outs
Top Layer:
  rectangle: -36.6,-15.5 -29.3,-10.5

## Other copper
Top Layer:
  drawing of 187 lines, arcs and shapes, not listed

## Silkscreen, mask and mechanical layers (free items; w line width, h text height)
Top Overlay:
  text "BLBB V4, JP, 01.2023" at 17.954,-19.079 h0.8
Mechanical 1:
  lines w0.2: -36.5,-19.73 ccw(c-35.23,-19.73) -35.23,-21 ; -36.5,23.73 cw(c-35.23,23.73) -35.23,25 -34.5,25 35.23,25 cw(c35.23,23.73) 36.5,23.73 36.5,-19.73 cw(c35.23,-19.73) 35.23,-21 -35.5,-21 ; 5.5,74 cw(c5.5,73) 6.5,73